# EAGLE board Sch_2 (EAGLE 7.5.0)
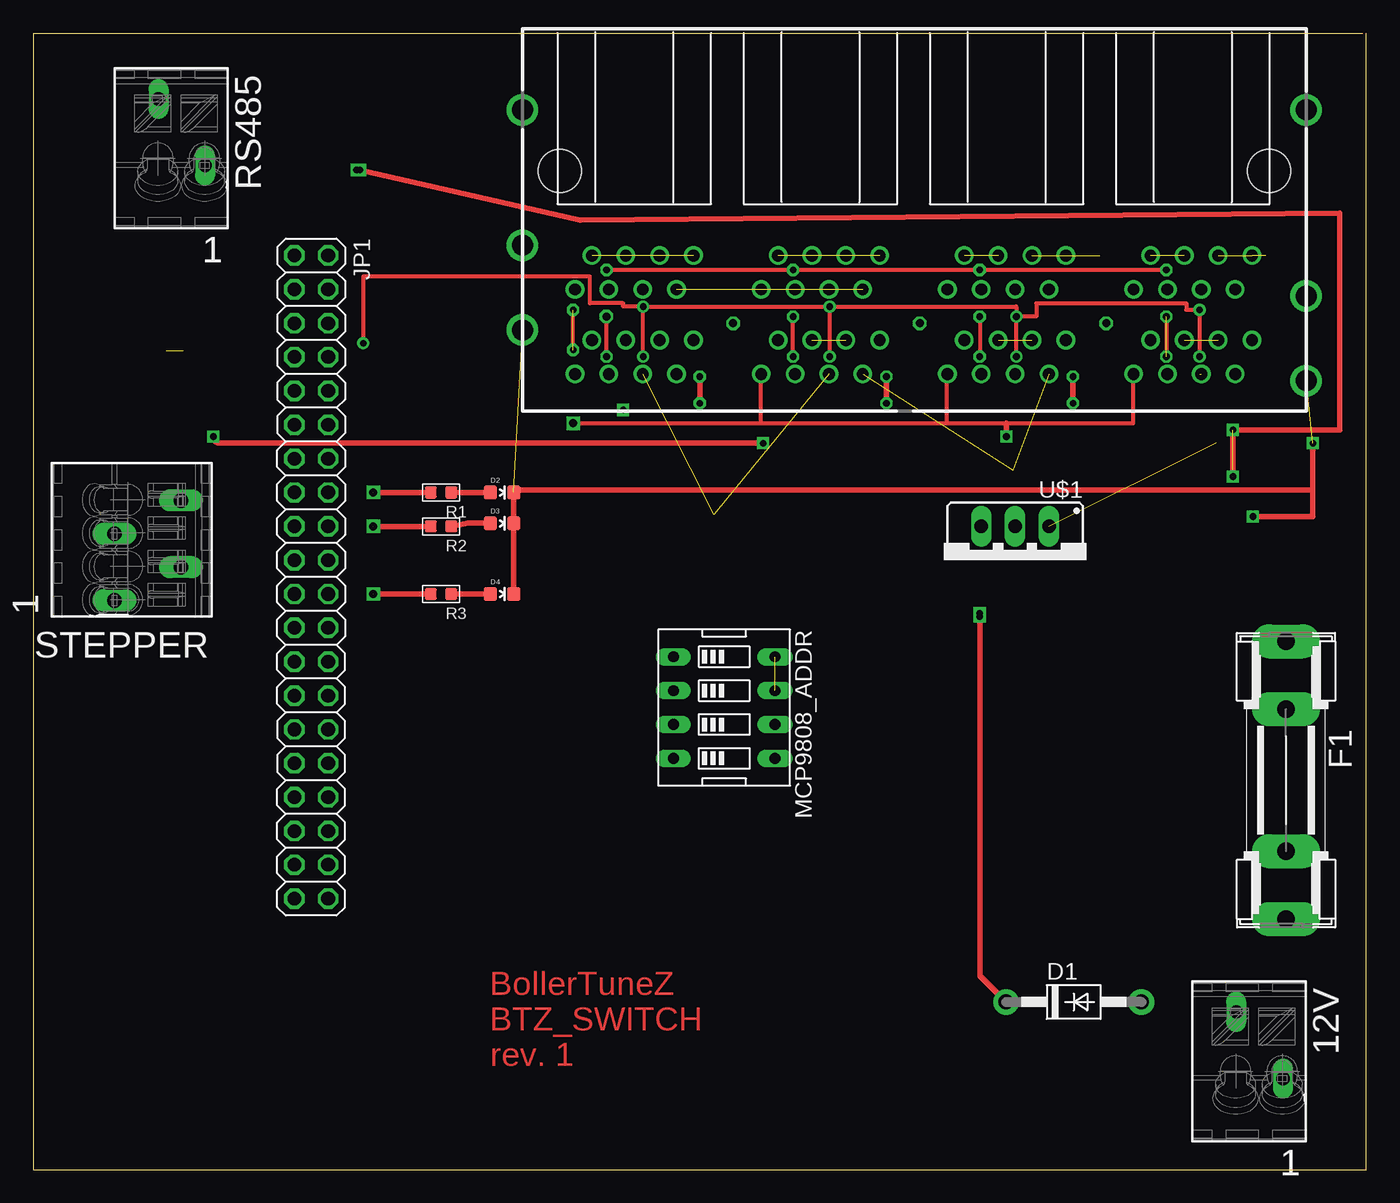
[diagram p0: board, top side]
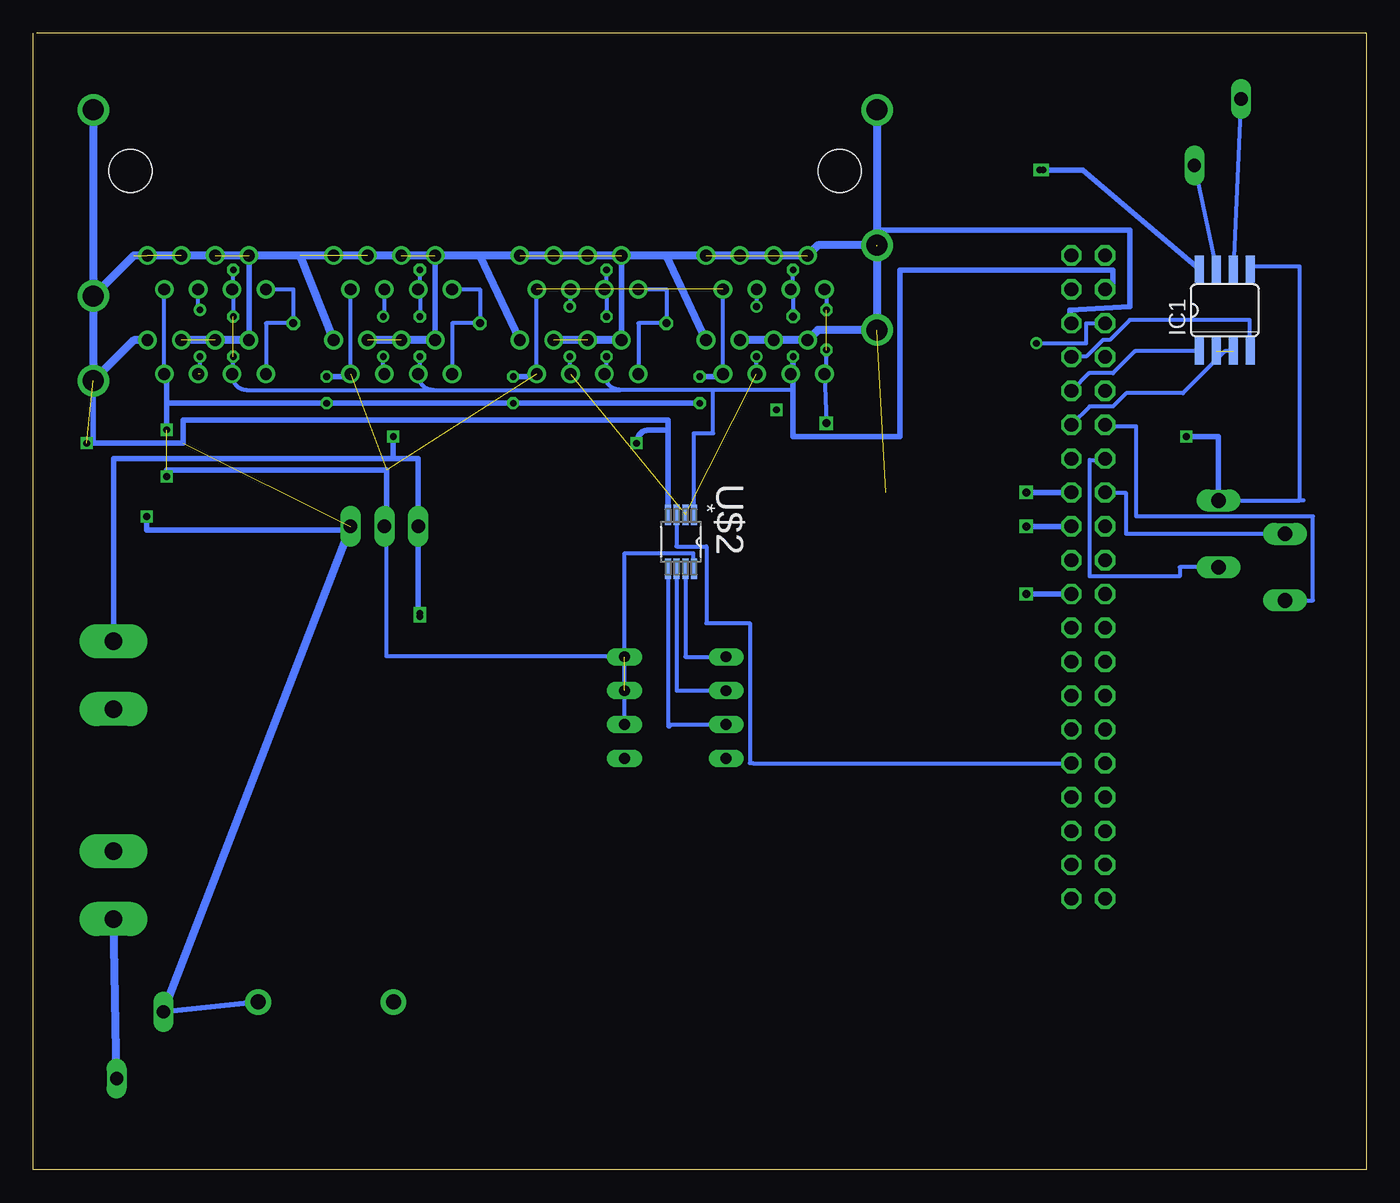
[diagram p1: board, bottom side, seen from below]

Size 100 x 85.25 mm. Coordinates in mm from the lower left corner, seen from the top.
Outline: 99.75,85.25 0,85.25 0,0 100,0 100,85.25
Copper layers (1*16): Top 0.035mm / dielectric 1.5mm / Bottom 0.035mm
Design rules "default": minimum track width 10mil, minimum drill 24mil, track to track 8mil, track to pad 8mil, pad to pad 8mil, via to via 8mil, smd to smd 8mil, copper to edge 40mil, drill to drill 8mil, minimum pad ring 10mil, minimum via ring 8mil, stop-mask expansion 4mil, vias tented up to drill 0mil, thermal gap 10mil

## Footprints (pad centres in the part's own frame; a part is rotated, then mirrored left to right if it is on the bottom)
P-250-202 = drill 1 long: L1 1.3,2.55; L2 -3.7,-0.95
DO41-10 = drill 1.118 pad 1.93: A 5.08,0; C -5.08,0
LED-0603 = smd 1 x 1: A 0,-0.877; C 0,0.877
SHK20L = drill 1.321 pad 2.54 long: 1A -10.414,0; 1B -5.334,0; 2A 10.414,0; 2B 5.334,0
SO08 = smd 0.66 x 2.032: 1 -1.905,-3.073; 2 -0.635,-3.073; 3 0.635,-3.073; 4 1.905,-3.073; 5 1.905,3.073; 6 0.635,3.073; 7 -0.635,3.073; 8 -1.905,3.073
2X20 = drill 1.016 octagon: 1 -24.13,-1.27; 2 -24.13,1.27; 3 -21.59,-1.27; 4 -21.59,1.27; 5 -19.05,-1.27; 6 -19.05,1.27; 7 -16.51,-1.27; 8 -16.51,1.27; 9 -13.97,-1.27; 10 -13.97,1.27; 11 -11.43,-1.27; 12 -11.43,1.27; 13 -8.89,-1.27; 14 -8.89,1.27; 15 -6.35,-1.27; 16 -6.35,1.27; 17 -3.81,-1.27; 18 -3.81,1.27; 19 -1.27,-1.27; 20 -1.27,1.27; 21 1.27,-1.27; 22 1.27,1.27; 23 3.81,-1.27; 24 3.81,1.27; 25 6.35,-1.27; 26 6.35,1.27; 27 8.89,-1.27; 28 8.89,1.27; 29 11.43,-1.27; 30 11.43,1.27; 31 13.97,-1.27; 32 13.97,1.27; 33 16.51,-1.27; 34 16.51,1.27; 35 19.05,-1.27; 36 19.05,1.27; 37 21.59,-1.27; 38 21.59,1.27; 39 24.13,-1.27; 40 24.13,1.27
EDG-04 = drill 0.813 long: 1 -3.81,-3.81; 2 -1.27,-3.81; 3 1.27,-3.81; 4 3.81,-3.81; 5 3.81,3.81; 6 1.27,3.81; 7 -1.27,3.81; 8 -3.81,3.81
R0603 = smd 0.889 x 0.889: 1 0,0.762; 2 0,-0.762
P-250-404 = drill 1.1 long: L1 1.3,4.513; L2 -3.7,2.013; L3 1.3,-0.487; L4 -3.7,-2.987
TO220S = drill 1.016 long: 1 -2.54,-2.54; 2 0,-2.54; 3 2.54,-2.54
SOP65P490X110-8N = smd 1.524 x 0.457: 1 -2.032,0.965; 2 -2.032,0.33; 3 -2.032,-0.33; 4 -2.032,-0.965; 5 2.032,-0.965; 6 2.032,-0.33; 7 2.032,0.33; 8 2.032,0.965
JACK8 = drill 0.889: 1-14 -21.59,7.62; 5V1 -25.4,3.81; 5V2 -11.43,3.81; 5V3 2.54,3.81; 5V4 16.51,3.81; 5V5 -25.4,10.16; 5V6 -11.43,10.16; 5V7 2.54,10.16; 5V8 16.51,10.16; 12V1 -17.78,3.81; 12V2 -3.81,3.81; 12V3 10.16,3.81; 12V4 24.13,3.81; 12V5 -17.78,10.16; 12V6 -3.81,10.16; 12V7 10.16,10.16; 12V8 24.13,10.16; GND1 -26.67,1.27; GND2 -24.13,1.27; GND3 -21.59,1.27; GND4 -19.05,1.27; GND5 -12.7,1.27; GND6 -10.16,1.27; GND7 -7.62,1.27; GND8 -5.08,1.27; GND9 1.27,1.27; GND10 3.81,1.27; GND11 6.35,1.27; GND12 8.89,1.27; GND13 15.24,1.27; GND14 17.78,1.27; GND15 20.32,1.27; GND16 22.86,1.27; GND17 -26.67,7.62; GND18 -24.13,7.62; GND19 -19.05,7.62; GND20 -12.7,7.62; GND21 -10.16,7.62; GND22 -7.62,7.62; GND23 -5.08,7.62; GND24 1.27,7.62; GND25 3.81,7.62; GND26 6.35,7.62; GND27 8.89,7.62; GND28 15.24,7.62; GND29 17.78,7.62; GND30 20.32,7.62; GND31 22.86,7.62; SCL1 -22.86,3.81; SCL2 -8.89,3.81; SCL3 5.08,3.81; SCL4 19.05,3.81; SCL5 -22.86,10.16; SCL6 -8.89,10.16; SCL7 5.08,10.16; SCL8 19.05,10.16; SDA1 -20.32,3.81; SDA2 -6.35,3.81; SDA3 7.62,3.81; SDA4 21.59,3.81; SDA5 -20.32,10.16; SDA6 -6.35,10.16; SDA7 7.62,10.16; SDA8 21.59,10.16 | drill 1.575 pad 2.184: G1 -30.734,-9.652; G3 28.067,-9.652; G6 -30.734,4.318; G7 28.067,0.508; G8 28.067,6.858; G9 -30.734,10.668 | hole 3.251: -27.94,-5.08; 25.273,-5.08

## Placement (x,y rotation side)
12V  250-202  [P-250-202]  91.2,8.13 270 top
D1  1N4004  [DO41-10]  78.06,12.57 0 top
D2  RED  [LED-0603]  35.17,50.8 270 top
D3  GREEN  [LED-0603]  35.17,48.49 270 top
D4  Orange  [LED-0603]  35.17,43.18 270 top
F1  [SHK20L]  93.98,29.21 270 top
IC1  MAX485CSA  [SO08]  10.61,64.47 0 bottom
JP1  [2X20]  20.85,44.45 270 top
MCP9808_ADDR  [EDG-04]  51.83,34.66 270 top
R1  150R  [R0603]  30.59,50.8 90 top
R2  191R  [R0603]  30.59,48.26 90 top
R3  160R  [R0603]  30.59,43.18 90 top
RS485  250-202  [P-250-202]  10.34,76.63 270 top
STEPPER  250-404  [P-250-404]  7.38,47.21 180 top
U$1  LM1086TO220V  [TO220S]  73.66,45.72 180 top
U$2  MCP9808-E/MS  [SOP65P490X110-8N]  51.41,47.1 270 bottom
U$3  BTZ_I2C_JACK8  [JACK8]  64.77,69.85 180 top

## Library data of the parts
12V RS485 STEPPER = con-wago_250
D1 = adafruit
D2 = SparkFun-LED; PROD_ID: DIO-00819
D3 = SparkFun-LED; PROD_ID: DIO-00821
D4 = SparkFun-LED; PROD_ID: DIO-09003
F1 = fuse; OC_FARNELL: unknown; OC_NEWARK: unknown
IC1 = andereBauteile
JP1 = pinhead-1
MCP9808_ADDR = special
R1-R3 = Seeed-Resistor-2016; MPN: RC0603JR-07100RL
U$1 = v-reg-2
U$2 = mcp9808; MPN: MCP9808-E/MS; OC_FARNELL: 2080523; OC_NEWARK: 89T8871; PACKAGE: MSOP-8; SUPPLIER: MICROCHIP
U$3 = Btz

## Nets
N$2: JP1.3 U$2.1 U$3.SDA1 U$3.SDA2 U$3.SDA3 U$3.SDA4 U$3.SDA5 U$3.SDA6 U$3.SDA7 U$3.SDA8
N$3: JP1.5 U$2.2 U$3.SCL1 U$3.SCL2 U$3.SCL3 U$3.SCL4 U$3.SCL5 U$3.SCL6 U$3.SCL7 U$3.SCL8
N$4: 12V.L1 F1.2A
N$5: JP1.15 STEPPER.L3
N$6: JP1.11 STEPPER.L1
N$7: JP1.13 STEPPER.L2
N$8: IC1.8 MCP9808_ADDR.6 MCP9808_ADDR.7 MCP9808_ADDR.8 U$1.2 U$2.8 U$3.5V1 U$3.5V2 U$3.5V3 U$3.5V4 U$3.5V5 U$3.5V6 U$3.5V7 U$3.5V8
N$9: IC1.2 IC1.3 JP1.12
N$10: IC1.1 JP1.10
N$11: IC1.4 JP1.8
N$12: IC1.6 RS485.L2
N$13: IC1.7 RS485.L1
N$31: JP1.16 R1.1
N$32: JP1.18 R2.1
N$33: JP1.22 R3.1
N$34: D4.A R3.2
N$35: D3.A R2.2
N$36: D2.A R1.2
N$37: 12V.L2 D1.A IC1.5 STEPPER.L4 U$1.1 U$2.4
N$38: MCP9808_ADDR.1 U$2.7
N$39: MCP9808_ADDR.2 U$2.6
N$40: MCP9808_ADDR.3 U$2.5
N$41: JP1.32 U$2.3
N$54: D1.C F1.1A U$1.3 U$3.12V1 U$3.12V2 U$3.12V3 U$3.12V4 U$3.12V5 U$3.12V6 U$3.12V7 U$3.12V8
N$79: D2.C D3.C D4.C JP1.6 U$3.1-14 U$3.G1 U$3.G3 U$3.G6 U$3.G7 U$3.G8 U$3.G9 U$3.GND1 U$3.GND2 U$3.GND3 U$3.GND4 U$3.GND5 U$3.GND6 U$3.GND7 U$3.GND8 U$3.GND9 U$3.GND10 U$3.GND11 U$3.GND12 U$3.GND13 U$3.GND14 U$3.GND15 U$3.GND16 U$3.GND17 U$3.GND18 U$3.GND19 U$3.GND20 U$3.GND21 U$3.GND22 U$3.GND23 U$3.GND24 U$3.GND25 U$3.GND26 U$3.GND27 U$3.GND28 U$3.GND29 U$3.GND30 U$3.GND31

## Tracks (layer width: path | path; a pad name or v marks a point on that pad's centre or on a via)
N$1  (via drill 0.5)
  other vias: 71,41.75
N$2  (via drill 0.5)  (1 unrouted)
  Top 0.305: v43,67.5 v57,67.5 v71,67.5 v85,67.5
  Bottom 0.305: 49,58.5 43,58.5 U$3.SDA8 43,59.69 43,61 | 49,58.5 55.96,58.5 | 55.96,58.5 arc90 U$3.SDA7 57,59.69 57,61 | 70,58.5 arc90 71.12,59.62 U$3.SDA6 71,59.69 71,61 | 70,58.5 55.96,58.5 | 70,58.5 84,58.5 arc90 85.09,59.59 U$3.SDA5 85,59.69 85,61 | U$3.SDA4 43,66.04 | 43,66.04 43,64 | U$3.SDA3 57,66.04 | 57,66.04 v57,67.5 | 57,66.04 57,64 | U$3.SDA2 71,66.04 | 71,66.04 71,64 | 71,66.04 v71,67.5 | U$3.SDA1 85,66.04 | 85,66.04 85,64 | 85,66.04 v85,67.5 | 43,66.04 v43,67.5 | U$2.1 50.45,55.25 49,55.25 49,58.5
  Bottom 0.406: JP1.3 19.08,66.5 19,66.5 19,67.5 35,67.5 35,55 43,55 43,61
N$3  (via drill 0.5)  (3 unrouted)
  Top 0.305: v87.5,61 v87.5,64.5 86.5,64.5 86.5,65 75.25,65 75.25,64 v73.75,64 | v73.75,61 v73.75,64 | v59.75,61 v59.75,64.75 | v45.75,61 v45.75,64.75 | v45.75,64.75 73.75,64.75 v73.75,64 | v45.75,64.75 44.25,64.75 44.25,65 41.75,65 41.75,67 24.75,67 v24.75,62
  Bottom 0.305: 87.5,59.69 v87.5,61 | v87.5,64.5 87.63,64.5 U$3.SCL1 | U$3.SCL6 73.75,59.69 v73.75,61 | v73.75,64 73.66,64 U$3.SCL2 | U$3.SCL7 59.75,59.69 v59.75,61 | v59.75,64.75 59.69,64.75 U$3.SCL3 | U$3.SCL8 45.75,59.69 v45.75,61 | v45.75,64.75 45.72,64.75 U$3.SCL4 | v24.75,62 21,62 21,63.5 JP1.5
N$4
  Bottom 0.61: 12V.L1 F1.2A
N$5
  Bottom 0.305: STEPPER.L3 18,47.7 18,50.75 19.58,50.75 JP1.15
N$6
  Bottom 0.305: STEPPER.L1 4,42.7 4,49 17.25,49 17.25,55.75 19.58,55.75 JP1.11
N$7
  Bottom 0.305: STEPPER.L2 14,45.2 14,44.5 20.75,44.5 20.75,53.25 19.58,53.25 JP1.13
N$8  (via drill 0.5)  (6 unrouted)
  Top 0.406: v24.5,75 41,71.25 98,71.75 98,55.5 90,55.5 90,52
  Bottom 0.305: U$3.5V5 U$3.5V1 | U$3.5V6 U$3.5V2 | U$3.5V7 U$3.5V3 | U$3.5V8 U$3.5V4 | MCP9808_ADDR.6 MCP9808_ADDR.8 55.64,38.5 | 55.64,38.5 73.5,38.5 73.5,48.26 | 55.64,38.5 55.64,46.25 50.5,46.25 50.5,45.07 U$2.8
  Bottom 0.406: U$1.2 73.5,48.26 73.5,52.5 90,52.5 90,52 | U$3.5V5 90,59.69 90,55.5 | IC1.8 21.25,75 v24.25,75 v24.5,75
N$9  (1 unrouted)
  Bottom 0.305: IC1.3 10.6,61.4 13.75,58.25 18,58.25 19,57.25 20.75,57.25 JP1.12
N$10
  Bottom 0.305: IC1.1 17.35,61.4 19,59.75 20.79,59.75 JP1.10
N$11
  Bottom 0.305: IC1.4 8.75,61.4 8.75,63.75 17.75,63.75 19.25,62.25 19.75,62.25 21,61 22.08,61 JP1.8
N$12
  Bottom 0.305: RS485.L2 IC1.6
N$13
  Bottom 0.305: RS485.L1 IC1.7
N$14  (via drill 0.6)
  other vias: 25.51,50.8
N$16  (via drill 0.6)
  other vias: 25.51,48.26
N$17  (via drill 0.6)
  other vias: 25.51,43.18
N$19  (via drill 0.6)
  other vias: 52.5,63.5
N$20  (via drill 0.6)
  other vias: 66.5,63.5
N$21  (via drill 0.6)
  other vias: 80.5,63.5
N$22  (via drill 0.5)
  other vias: 44.25,57
N$24  (via drill 0.5)
  Top 0.305: v71,64 v71,61
N$26  (via drill 0.5, 0.6)
  Top 0.305: v43,61 v43,64
N$27  (via drill 0.5)
  Top 0.406: v90,52 v90,55.5
N$28  (via drill 0.5)
  Top 0.305: v40.5,61.5 v40.5,64.5
N$30  (via drill 0.5)
  other vias: 73,55
N$31  (1 unrouted)
  Top 0.406: R1.1 25.51,50.8
  Bottom 0.406: JP1.16 25.51,50.8
N$32  (1 unrouted)
  Top 0.406: R2.1 25.51,48.26
  Bottom 0.406: JP1.18 25.51,48.26
N$33  (1 unrouted)
  Top 0.406: R3.1 25.51,43.18
  Bottom 0.406: JP1.22 25.51,43.18
N$34
  Top 0.406: R3.2 D4.A
N$35
  Top 0.406: R2.2 32.62,48.49 D3.A
N$36
  Top 0.406: R1.2 D2.A
N$37  (via drill 0.5)  (1 unrouted)
  Top 0.406: v13.5,55 arc90 14,54.5 v54.75,54.5
  Bottom 0.305: STEPPER.L4 5,50.2 | 4.71,50.2 5,50.2 | 5,50.2 5,67.75 8.71,67.75 IC1.5
  Bottom 0.406: U$2.4 52.38,55.5 | 52.38,55.5 52.38,56.25 88.75,56.25 88.75,54.5 96,54.5 | STEPPER.L4 11.08,55 v13.5,55 | v54.75,54.5 arc90 53.75,55.5 52.38,55.5 | 12V.L2 D1.A
  Bottom 0.61: U$1.1 12V.L2
N$38
  Bottom 0.305: U$2.7 51.08,38.47 MCP9808_ADDR.1
N$39
  Bottom 0.305: U$2.6 51.74,35.93 MCP9808_ADDR.2
N$40
  Bottom 0.305: U$2.5 52.38,33.25 52.25,33.25 52.25,33.39 MCP9808_ADDR.3
N$41
  Bottom 0.305: U$2.3 51.74,46.75 | 51.74,46.75 51.75,46.75 | 51.74,46.75 49.5,46.75 49.5,41 46.25,41 46.25,30.5 46,30.5 46,30.48 JP1.32
N$42  (via drill 0.5)
  Top 0.305: v57,61 v57,64
N$43  (via drill 0.5)
  Top 0.406: v91.5,49 96,49 v96,54.5
  Bottom 0.406: 76,48 91.5,48 v91.5,49 | v96,54.5 95.5,54.5 95.5,59.5
N$50  (via drill 0.5)
  Top 0.305: v85,64 v85,61
N$54  (via drill 0.5, 0.6)  (1 unrouted)
  Top 0.305: v40.5,56 54.61,56 | 54.61,56 68.5,56 | 68.5,56 73,56 82.5,56 82.5,59.69 U$3.12V5 | U$3.12V6 68.5,59.69 68.5,56 | 54.61,56 U$3.12V7
  Top 0.406: v73,55 73,56 | D1.C 71,14.55 v71,41.5
  Bottom 0.305: v40.5,56 U$3.12V8 40.5,59.69 40.5,61.5 | U$3.12V3 52.5,66.04 52.5,63.5 54.61,63.5 U$3.12V7 | U$3.12V2 66.5,66.04 66.5,63.5 68.58,63.5 U$3.12V6 | U$3.12V1 80.5,66.04 80.5,63.5 82.55,63.5 U$3.12V5 | U$3.12V4 40.5,66.04 40.5,64.5
  Bottom 0.406: F1.1A 93.98,53.34 73,53.34 | 73,53.34 71.12,53.34 U$1.3 71.12,41.62 v71,41.5 | 73,53.34 v73,55
N$55  (via drill 0.5)
  Top 0.406: v50,59.5 v50,57.5 | v64,57.5 v64,59.5 | v78,57.5 v78,59.5
  Bottom 0.406: 48,59.5 v50,59.5 | v50,57.5 v64,57.5 v78,57.5 90,57.5 90,60 | v64,59.5 62,59.5 | v78,59.5 76,59.5
N$79  (18 unrouted)
  Top 0.406: D4.C D2.C arc-90 36.25,51 96,51 96,54.5
  Bottom 0.406: U$3.GND12 U$3.GND27 | U$3.GND8 U$3.GND23 | U$3.GND4 U$3.GND19 | JP1.6 22.25,64.5 17.75,64.75 17.75,70.5 36.7,70.5
  Bottom 0.61: 52.5,68.58 U$3.GND16 41.15,69.34 U$3.G7 U$3.G8 41.15,62.99 U$3.GND31 U$3.GND30 U$3.GND29 | 52.5,68.58 U$3.GND12 66.5,68.58 | 66.5,68.58 U$3.GND8 80,68.58 | 80,68.58 U$3.GND4 92.46,68.58 U$3.G6 | U$3.G6 U$3.G9 92.46,62.23 U$3.GND17 | U$3.GND27 U$3.GND25 | U$3.GND23 U$3.GND21 | U$3.GND19 U$3.GND18 | U$3.GND20 80,68.58 | U$3.GND24 66.5,68.58 | U$3.GND28 52.5,68.58 | U$3.G3 36.7,70.5 36.7,69.3 arc90 37,69 | U$3.G1 U$3.G6

## Text on the board
Top: BollerTuneZ / BTZ_SWITCH / rev. 1